# Altium PCB Uravu_2.PcbDoc
Units mil, origin at the board's own origin, x right, y up, seen from the top; angles counter-clockwise.
Board outline 3825.79 x 3924.21 mil, 2 copper layers (Top Layer, Bottom Layer); 72 components, 63 nets, 226 pads, 10 vias.
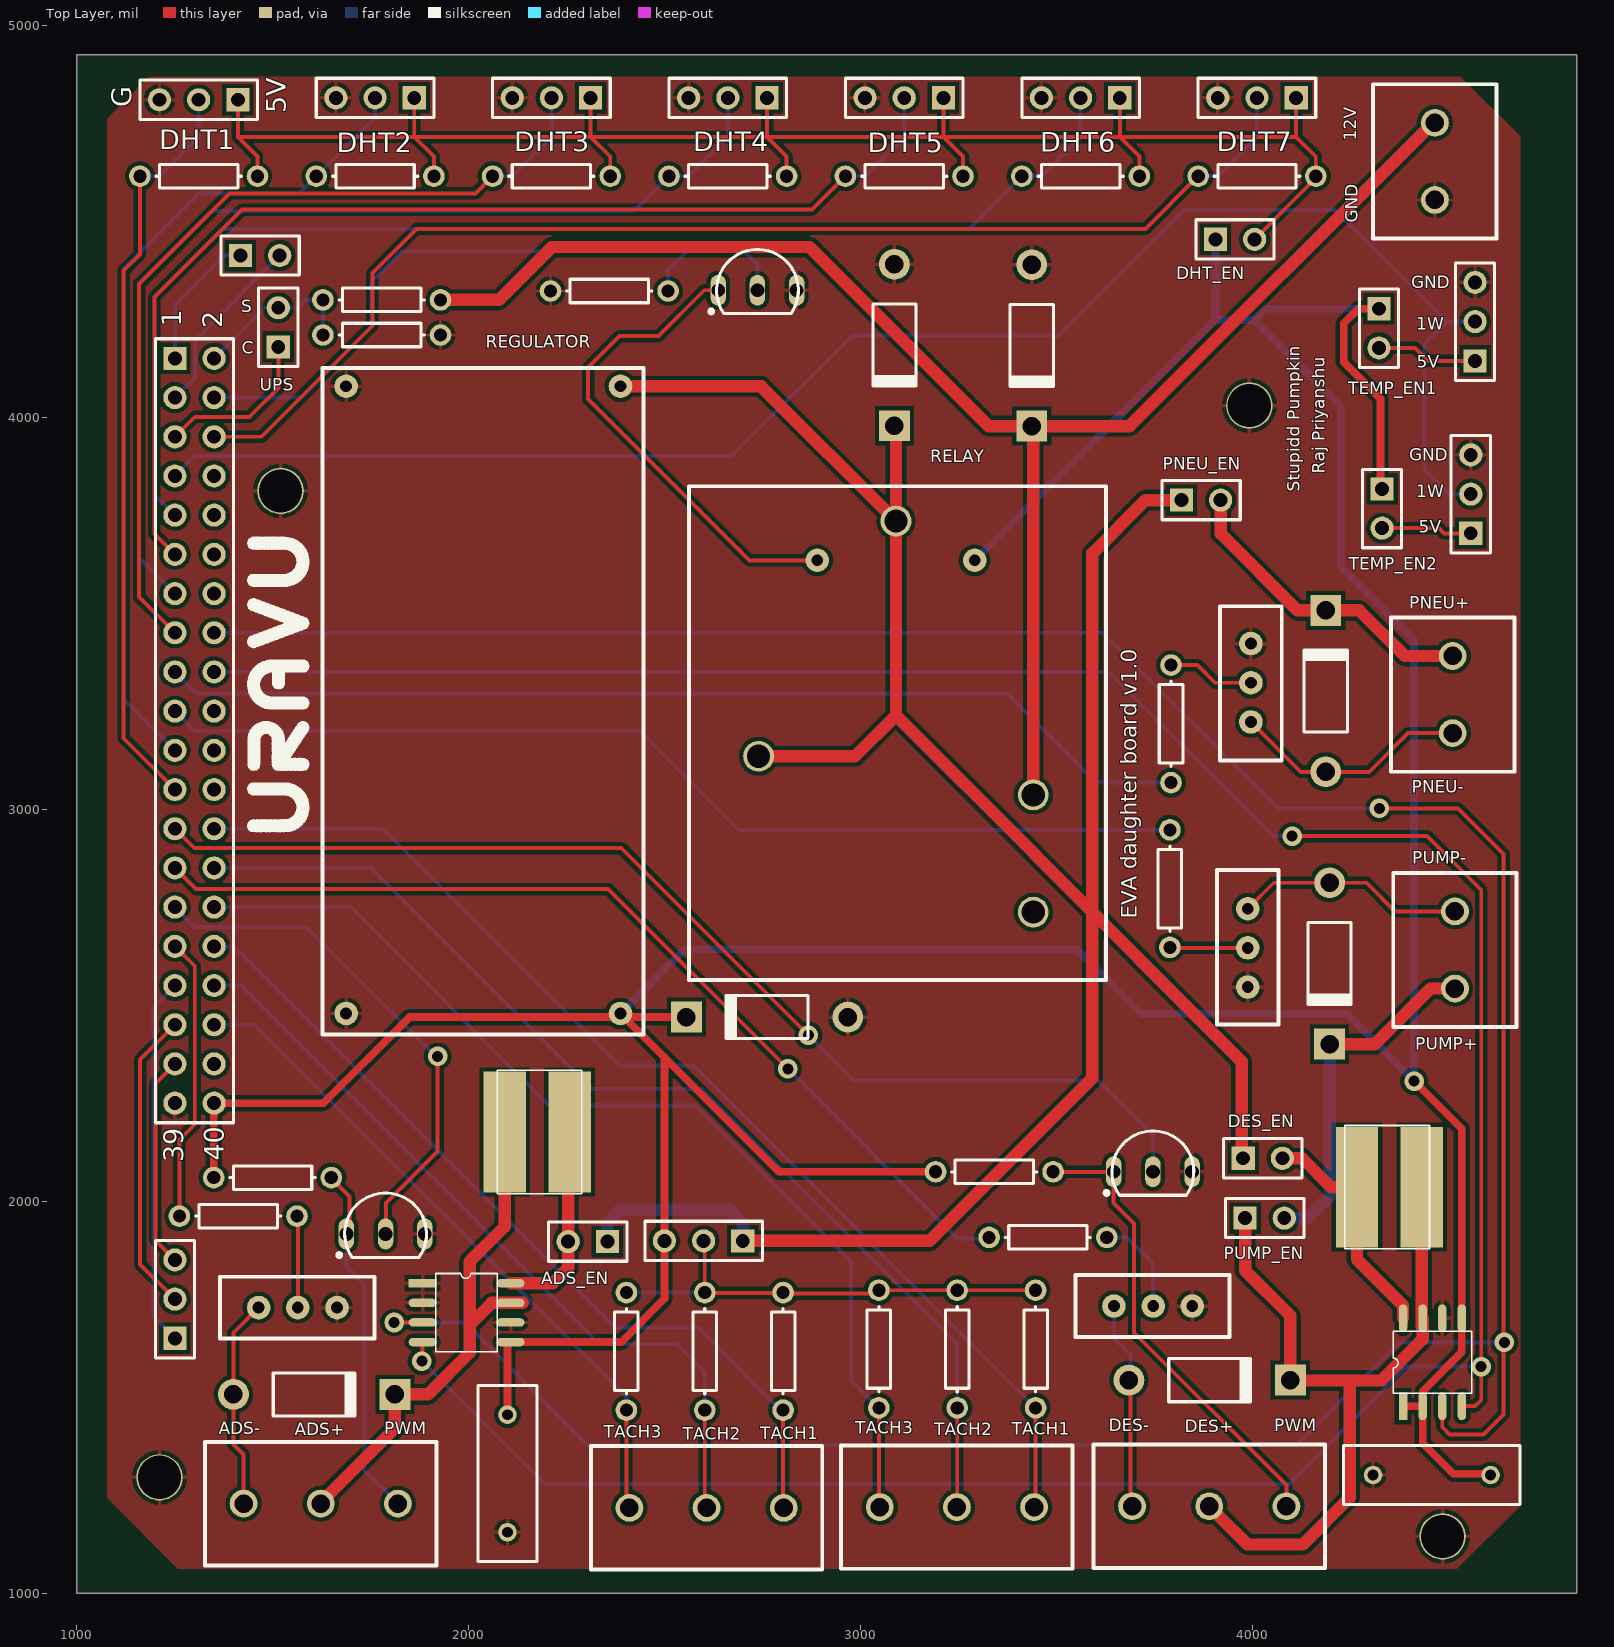
[diagram p0: Top Layer view]
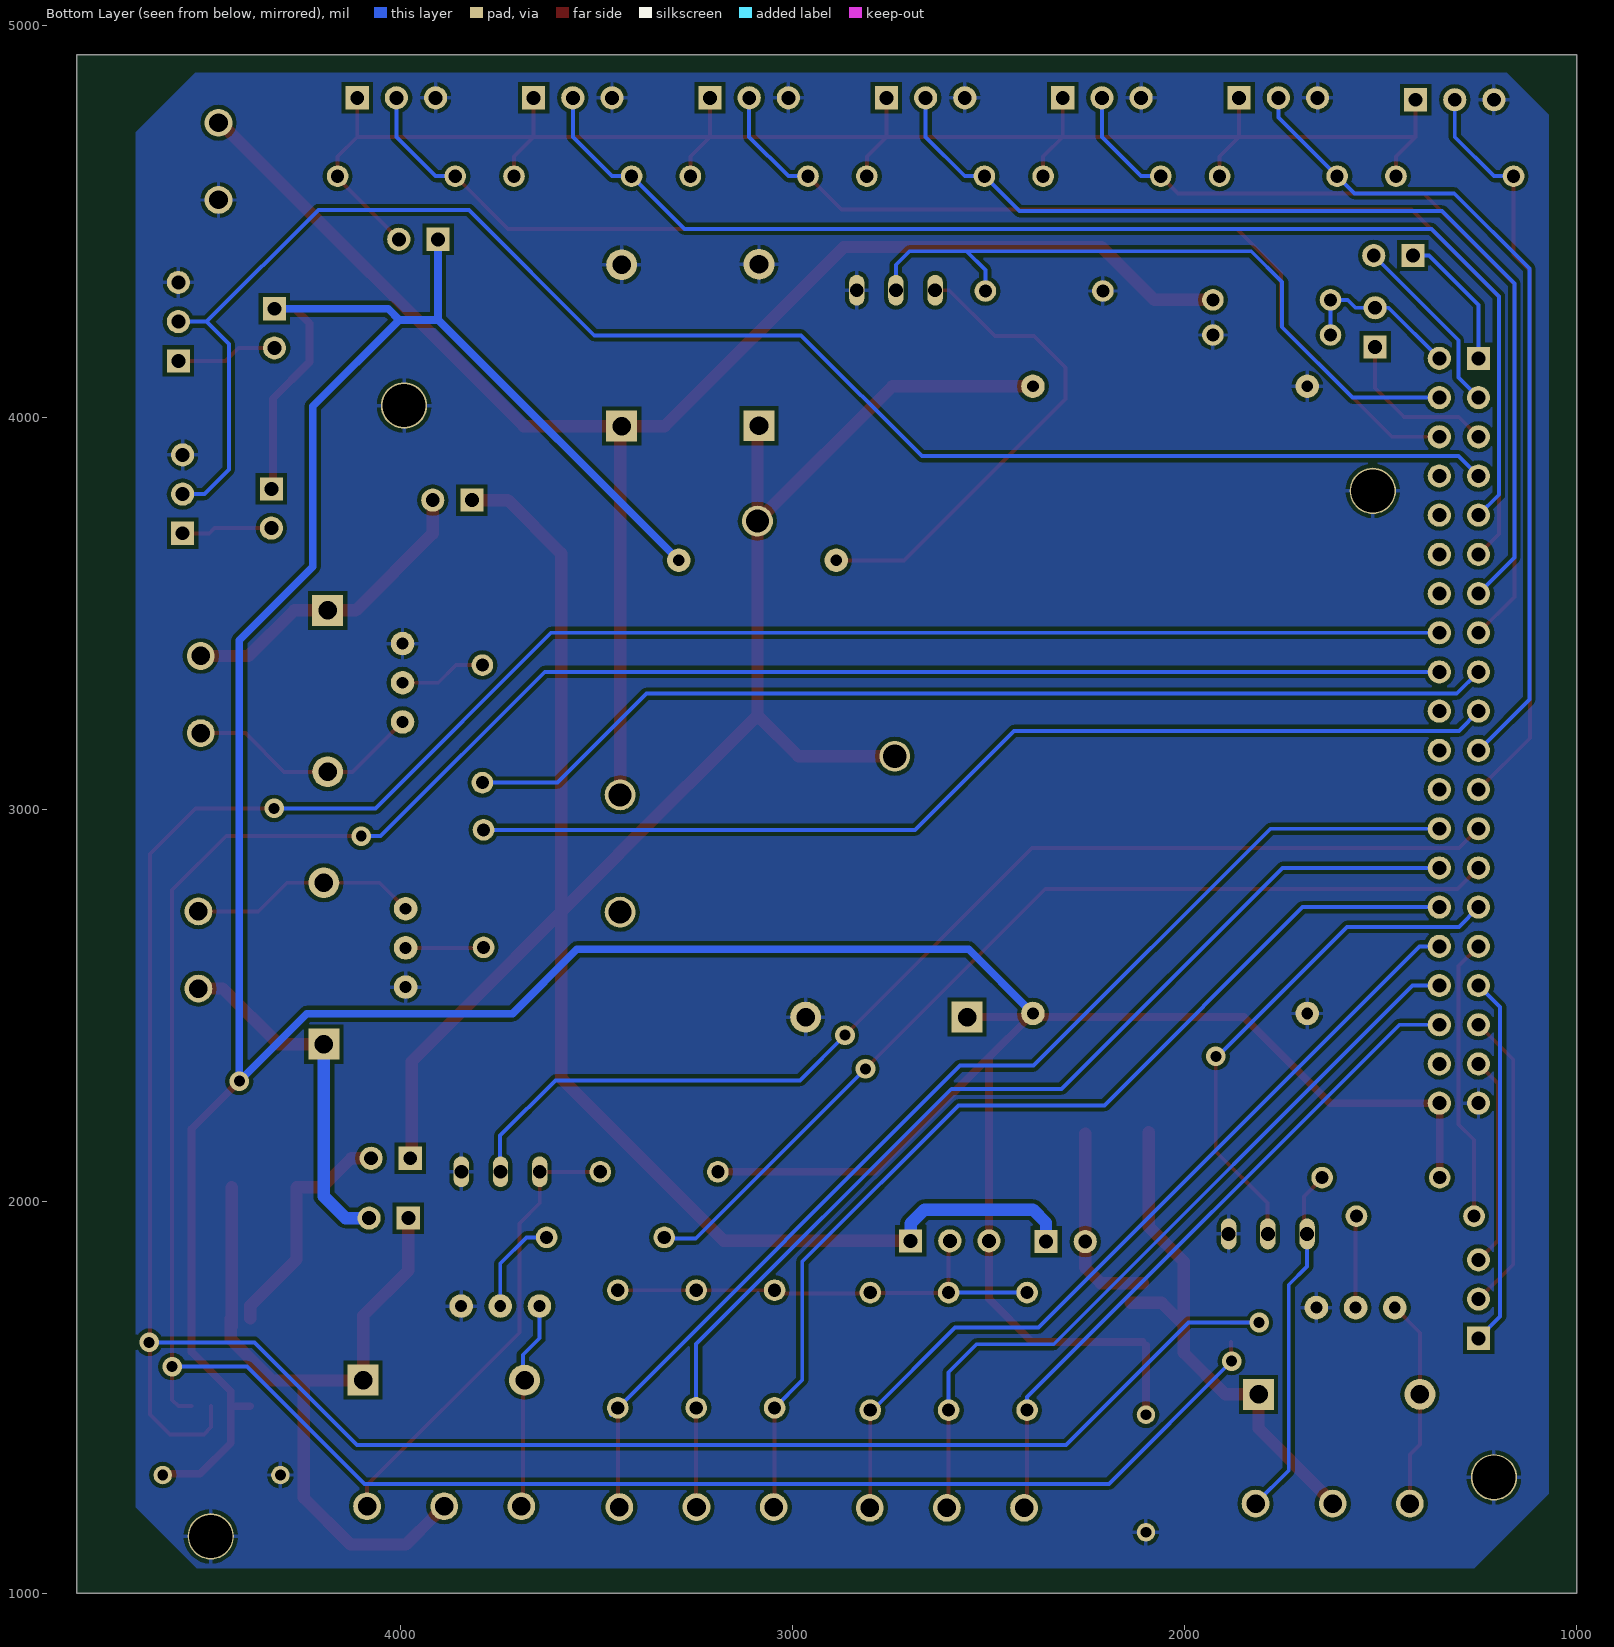
[diagram p1: Bottom Layer view, seen from below]

## Layer stack, top to bottom
Top Solder: solder mask 0.4, Solder Resist, Dk 3.5
Top Layer: signal copper 1.4
Dielectric 1: dielectric 12.6, FR-4, Dk 4.8
Bottom Layer: signal copper 1.4
Bottom Solder: solder mask 0.4, Solder Resist, Dk 3.5

## Board outline
1000,1000 4825.79,1000 4825.79,4924.21 1000,4924.21

## Design rules (kind name [scope] priority, off if disabled: settings)
Clearance [All] p1: gap=10
PolygonConnect [All] p1: connectstyle=Relief reliefconductorwidth=10 reliefentries=4 polygonreliefangle="90 Angle" airgapwidth=10
RoutingVias [All] p1: holewidth=28 width=50 viastyle="Through Hole" minholewidth=28 minwidth=50 maxholewidth=28 maxwidth=50
SolderMaskExpansion [All] p1: expansion=4
UnpouredPolygon [All] p1: allowunpoured=FALSE
Width [All] p1: maxlimit=39.37 minlimit=10 preferedwidth=10
29 further rules are at their usual default settings.

## Components (designator, comment, footprint, x,y, rotation, side; value= is the part's Value field where it differs from the comment)
C1 "Cap" RAD-0.3 2098.43,1305.12 r90 top
C2 "Cap" RAD-0.3 4456.69,1301.18 r0 top
D1 "Diode 1N4007" DO-41 1605.32,1506.89 r0 top
D2 "Diode 1N4007" DO-41 3436.02,4183.07 r270 top
D3 "Diode 1N4007" DO-41 2760.83,2469.49 r180 top
D4 "Diode 1N4007" DO-41 3085.63,4184.06 r270 top
D5 "Diode 1N4007" DO-41 3889.76,1543.31 r0 top
D6 "Diode 1N4007" DO-41 4195.87,2606.3 r270 top
D7 "Diode 1N4007" DO-41 4186.02,3301.18 r90 top
P1 "Header 3" "Screw Terminal 3" 2803.15,1217.52 r180 top
P2 "Header 3" "Screw Terminal 3" 1425.2,1228.35 r0 top
P3 "Header 20X2" HDR2X20 1250,4150 r270 top
P4 "Header 2" HDR1X2 2353.35,1896.65 r180 top
P5 "Header 3" HDR1X3 1250,1650 r90 top
P6 "Header 3" HDR1X3 2698.82,1898.62 r180 top
P7 "Header 2" HDR1X2 1513.78,4179.13 r90 top
P7 "Header 2" HDR1X2 3980.32,1956.69 r0 top
P8 "Header 2" "Screw Terminal 2" 4464.57,4750.98 r270 top
P9 "Header 2X2" "LM2596 Module" 2386.81,4078.74 r270 top
P10 "Header 3" "Screw Terminal 3" 3441.93,1219.49 r180 top
P11 "Header 3" "Screw Terminal 3" 3691.93,1221.46 r0 top
P12 "Header 2" "Screw Terminal 2" 4515.75,2542.32 r90 top
P13 "Header 2" HDR1X2 3975.39,2109.25 r0 top
P14 "Header 3" HDR1X3 1410.63,4809.76 r180 top
P15 "Header 3" HDR1X3 1860.63,4814.76 r180 top
P16 "Header 3" HDR1X3 2310.63,4814.76 r180 top
P17 "Header 3" HDR1X3 2760.63,4814.76 r180 top
P18 "Header 3" HDR1X3 3210.63,4814.76 r180 top
P19 "Header 3" HDR1X3 3660.63,4814.76 r180 top
P20 "Header 3" HDR1X3 4110.63,4814.76 r180 top
P21 "Header 2" HDR1X2 3904.53,4453.74 r0 top
P22 "Header 2" HDR1X2 3817.91,3788.39 r0 top
P23 "Header 3" HDR1X3 4556.1,3703.74 r90 top
P24 "Header 3" HDR1X3 4566.93,4143.7 r90 top
P25 "Header 2" "Screw Terminal 2" 4509.84,3390.75 r270 top
P26 "Header 2" HDR1X2 4329.72,3816.93 r270 top
P27 "Header 2" HDR1X2 4321.85,4276.57 r270 top
P28 "Header 2" HDR1X2 1417.32,4412.4 r0 top
Q1 "2N2222" TO-226AA 1787.4,1916.34 r0 top
Q2 "IRLB8721" TO-220AB 1463.58,1728.35 r0 top
Q3 "Relay" Relay 2888.78,3634.84 r90 top
Q4 "2N2222" TO-226AA 2736.22,4323.82 r0 top
Q5 "2N2222" TO-226AA 3745.08,2074.8 r0 top
Q6 "IRLB8721" TO-220AB 3645.67,1732.28 r0 top
Q7 "IRLB8721" TO-220AB 3987.2,2746.06 r270 top
Q8 "IRLB8721" TO-220AB 3995.08,3222.44 r90 top
R1 "Res1" AXIAL-0.3 3045.87,1622.64 r270 top
R2 "Res1" AXIAL-0.3 3245.87,1622.64 r270 top
R3 "Res1" AXIAL-0.3 3445.87,1622.64 r270 top
R4 "Res1" AXIAL-0.3 2401.77,1616.73 r270 top
R5 "Res1" 2827 2091.54,2176.18 r0 top
R6 "Res1" AXIAL-0.3 2601.77,1616.73 r270 top
R7 "Res1" AXIAL-0.3 1499.02,2060.04 r180 top
R8 "Res1" AXIAL-0.3 2801.77,1616.73 r270 top
R9 "Res1" AXIAL-0.3 1411.42,1961.61 r180 top
R10 "Res1" AXIAL-0.3 1777.56,4299.21 r0 top
R10 "Res1" AXIAL-0.3 2358.27,4321.85 r0 top
R11 "Res1" AXIAL-0.3 1777.56,4209.65 r180 top
R11 "Res1" 2827 4431.1,2035.43 r180 top
R12 "Res1" AXIAL-0.3 3340.55,2074.8 r180 top
R13 "Res1" AXIAL-0.3 3477.36,1907.48 r180 top
R14 "Res1" AXIAL-0.3 4010.63,4614.76 r0 top
R15 "Res1" AXIAL-0.3 3788.39,2797.24 r90 top
R16 "Res1" AXIAL-0.3 1310.63,4614.76 r0 top
R17 "Res1" AXIAL-0.3 1760.63,4614.76 r0 top
R18 "Res1" AXIAL-0.3 2210.63,4614.76 r0 top
R19 "Res1" AXIAL-0.3 2660.63,4614.76 r0 top
R20 "Res1" AXIAL-0.3 3110.63,4614.76 r0 top
R21 "Res1" AXIAL-0.3 3560.63,4614.76 r0 top
R22 "Res1" AXIAL-0.3 3791.34,3217.52 r270 top
U1 "INA" SOIC8 1885.83,1790.35 r0 top
U2 "INA" SOIC8 4383.27,1480.71 r90 top

## Footprints (in the part's own frame and the unit in brackets; to place one, negate y for a bottom-side part, rotate by r counter-clockwise, add the part's x,y. Pads: shape width x height; smd on the part's side, far side on the other; paste and mask are expansions set on the pad)
2827 [mm]
  rect 2.75x7.82 smd: 1(0,0) 2(4.2,0)
  silkscreen extent -0.5,-4 5,4
AXIAL-0.3 [mm] "Axial Device, Thru-Hole; 2 Leads; 0.3 in Pin Spacing"
  round 1.4 hole 0.85: 1(-3.81,0) 2(3.81,0)
  silkscreen extent -2.77,-0.76 2.77,0.76
DO-41 [mm] "Diode, Axial; Body 5.2 x 2.7 mm (LxDia. max), Lead Dia. 0.86 mm (max)"
  round 2 hole 1.2: 1(-5.23,0)
  rect 2x2 hole 1.2: 2(5.23,0)
  silkscreen extent -2.65,-1.4 2.75,1.4
HDR1X2 [mm] "Connector; Header; 2 Position"
  rect 1.5x1.5 hole 0.9: 1(0,0)
  round 1.5 hole 0.9: 2(2.54,0)
  silkscreen extent -1.27,-1.27 3.81,1.27
HDR1X3 [mm] "Connector; Header; 3 Position"
  rect 1.5x1.5 hole 0.9: 1(0,0)
  round 1.5 hole 0.9: 2(2.54,0) 3(5.08,0)
  silkscreen extent -1.27,-1.27 6.35,1.27
HDR2X20 [mm] "Connector; Header; 20x2 Position"
  rect 1.5x1.5 hole 0.9: 1(0,0)
  round 1.5 hole 0.9: 2(0,2.54) 3(2.54,0) 4(2.54,2.54) 5(5.08,0) 6(5.08,2.54) 7(7.62,0) 8(7.62,2.54) 9(10.16,0) 10(10.16,2.54) 11(12.7,0) 12(12.7,2.54) 13(15.24,0) 14(15.24,2.54) 15(17.78,0) 16(17.78,2.54) 17(20.32,0) 18(20.32,2.54) 19(22.86,0) 20(22.86,2.54) 21(25.4,0) 22(25.4,2.54) 23(27.94,0) 24(27.94,2.54) 25(30.48,0) 26(30.48,2.54) 27(33.02,0) 28(33.02,2.54) 29(35.56,0) 30(35.56,2.54) 31(38.1,0) 32(38.1,2.54) 33(40.64,0) 34(40.64,2.54) 35(43.18,0) 36(43.18,2.54) 37(45.72,0) 38(45.72,2.54) 39(48.26,0) 40(48.26,2.54)
  silkscreen extent -1.27,-1.27 49.53,3.81
"LM2596 Module" [mil] "DC-DC regulator used in Uravu Labs for 12V - 5V conversion"
  round 60 hole 30: 1(0,0) 2(1600,0) 3(0,-700) 4(1600,-700)
  silkscreen extent -47,-760 1654,59
RAD-0.3 [mm] "Radial Cap, Thru-Hole; 2 Leads; 0.3 in Pin Spacing"
  round 1.2 hole 0.7: 1(-3.81,0) 2(3.81,0)
  silkscreen extent -5.71,-1.91 5.71,1.91
Relay [mm] "L90CSDC12V"
  round 1.524 hole 0.762: 1(0,0) 2(0,-10.2)
  round 2 hole 1.5: 3(2.54,-5.1) 4(-12.7,3.8) 5(-22.8,-14) 6(-15.2,-14)
  silkscreen extent -27.2,-18.7 4.8,8.3
"Screw Terminal 2" [mm]
  round 1.8 hole 1.2: 1(0,0) 2(5,0)
  silkscreen extent -2.5,-4 7.5,4
"Screw Terminal 3" [mm]
  round 1.8 hole 1.2: 1(0,0) 2(5,0) 3(10,0)
  silkscreen extent -2.5,-4 12.5,4
SOIC8 [mm]
  rect 1.8x0.55 smd: 1(-0.1,0)
  oval 1.8x0.55 smd: 2(-0.1,-1.27) 3(-0.1,-2.54) 4(-0.1,-3.81) 5(5.6,-3.81) 6(5.6,-2.54) 7(5.6,-1.27) 8(5.6,0)
  silkscreen extent 0.75,-4.44 4.75,0.64
TO-220AB [mil] "IRLB8721"
  round 60 hole 30: 1(0,0) 2(100,0) 3(200,0)
  silkscreen extent -98,-79 295,79
TO-226AA [mm] "BJT"
  oval 1x2 hole 0.9: 1(-2.54,0) 2(0,0) 3(2.54,0)
  silkscreen extent -3.13,-1.52 2.65,2.65, body extent -2.66,-1.52 2.66,2.66, height 5.33

## Part data
C1 C2: "Capacitor"
D1 D2 D3 D4 D5 D6 D7: "1 Amp General Purpose Rectifier"
P1 P2 P5 P6 P10 P11 P14 P15 P16 P17 P18 P19 P20 P23 P24: "Header, 3-Pin"
P3: "Header, 20-Pin, Dual row"
P4 P7 P7 P8 P12 P13 P21 P22 P25 P26 P27 P28: "Header, 2-Pin"
P9: "Header, 2-Pin, Dual row"
Q1 Q4 Q5: library part NPN, "NPN Bipolar Transistor"
Q2 Q6 Q7 Q8: library part MOSFET-N, "N-Channel MOSFET"
R1 R2 R3 R4 R5 R6 R7 R8 R9 R10 R10 R11 R11 R12 R13 R14 R15 R16 R17 R18 R19 R20 R21 R22: "Resistor"
U1 U2: library part INA219, "INA219: Bidirectional Current/Power Monitor With I2C Interface"

## Free pads (board coordinates)
  round 118.11 hole 110.24: SHIELD(1210.63,1295.28) SHIELD(1519.68,3812.01) SHIELD(3991.14,4029.53) SHIELD(4484.25,1144.68)

## Via types
v1: diameter 50, hole 28, Top Layer to Bottom Layer, 10 vias

## Nets (pads, with @x,y where several pads share a name; then routed paths per layer and width w, separated by ;. In a path a pad name is that pad's centre, name@x,y a point inside that pad or via, vN(x,y) a via of type N, cw(c..) or ccw(c..) an arc to the next point about the centre after c; other vN are vias at no path point)
5V: C1.2 C2.2 D3.2 P3.40 P6.3 P9.2 P21.1 P26.1 P27.1 Q3.2 R7.2 R12.2 U1.5 U2.1 U2.2 U2.5 | length 11355.7
  Top Layer w19.68: R7.2@1349.02,2077.76 1349.02,2250 1628.94,2250 1848.43,2469.49 P9.2@2396.06,2469.49 ; C1.2 U1.5@2098.43,1632.48 ; U1.5 2388.39,1640.35 2498.82,1750.79 P6.3 2498.82,2366.73 ; P9.2 P9.2@2396.06,2469.49 ; D3.2 P9.2@2396.06,2469.49 ; R12.2 2790.75,2074.8 2498.82,2366.73 ; P27.1 4269.69,4276.57 4232.28,4239.17 4232.28,4140.75 4325.79,4047.24 P26.1@4325.79,3816.93 ; U2.1 U2.2 ; v1(4411.42,2306.1) 4533.27,2184.25 U2.5 4533.27,1614.96 4433.27,1514.96 U2.2 ; C2.2@4606.69,1304.13 4511.81,1304.13 4433.27,1382.68 U2.2 ; P9.2@2396.06,2469.49 2498.82,2366.73
  Bottom Layer w19.68: P9.2 2550.79,2642.72 3550.2,2642.72 3714.57,2478.35 4239.17,2478.35 v1(4411.42,2306.1) 4411.42,3431.1 4224.41,3618.11 4224.41,4027.56 4003.94,4248.03 3903.54,4248.03 Q3.2 ; 3904.53,4248.03 P21.1 ; 4002.95,4248.03 4031.5,4276.57 P27.1
5V1WA: P24.1 P27.2 | length 258.7
  Top Layer w10: P27.2 4413.98,4176.57 4446.85,4143.7 P24.1
5V1WB: P23.1 P26.2 | length 235.8
  Top Layer w10: P26.2@4325.79,3716.93 4475,3716.93 4488.19,3703.74 P23.1
5VDHT: P14.1 P15.1 P16.1 P17.1 P18.1 P19.1 P20.1 P21.2 R14.2 R16.2 R17.2 R18.2 R19.2 R20.2 R21.2 | length 4460.7
  Top Layer w10: P14.1 1410.63,4714.76 ; R16.2 1460.63,4664.76 1410.63,4714.76 ; P15.1 1860.63,4714.76 ; R17.2 1910.63,4664.76 1860.63,4714.76 ; P16.1 2310.63,4714.76 ; R18.2 2360.63,4664.76 2310.63,4714.76 ; P17.1 2760.63,4714.76 ; R19.2 2810.63,4664.76 2760.63,4714.76 ; P18.1 3210.63,4714.76 ; R20.2 3260.63,4664.76 3210.63,4714.76 ; P19.1 3660.63,4714.76 ; R21.2 3710.63,4664.76 3660.63,4714.76 ; P21.2 R14.2@4160.63,4609.84 ; P20.1 4110.63,4714.76 ; R14.2 4160.63,4664.76 4110.63,4714.76 ; 1410.63,4714.76 1860.63,4714.76 ; 1860.63,4714.76 2310.63,4714.76 ; 2310.63,4714.76 2760.63,4714.76 ; 2760.63,4714.76 3210.63,4714.76 ; 3210.63,4714.76 3660.63,4714.76 ; 3660.63,4714.76 4110.63,4714.76
12V: D2.2 P8.1 Q3.6 R10.2@1927.56,4299.21 | length 4042
  Top Layer w31.5: R10.2@1927.56,4299.21 2076.77,4299.21 2211.61,4434.06 2869.09,4434.06 3325.98,3977.17 D2.2 3685.83,3977.17 P8.1@4462.11,4753.44 ; Q3.6 3439.96,3970.28 D2.2@3444.88,3975.2
12VA: D4.2 P4.1 P6.1 P9.1 P13.1 P22.1 Q3.3 Q3.4 | length 6637.3
  Top Layer w31.5: P9.1 2745.67,4078.74 Q3.3 ; P6.1 3175.2,1898.62 3590.55,2313.98 3590.55,3652.56 3726.38,3788.39 P22.1 ; Q3.4 2985.24,3134.84 3089.57,3239.17 ; D4.2@3089.57,3978.15 Q3.3 ; P13.1@3971.46,2097.44 3971.46,2356.3 3444.88,2882.87 3444.88,2883.86 3089.57,3239.17 ; 3089.57,3239.17 Q3.3
  Bottom Layer w31.5: P4.1 2353.35,1944.88 2386.81,1978.35 2663.39,1978.35 2698.82,1942.91 P6.1
CE0N_RPI: P3.3 P28.2 | length 493.1
  Bottom Layer w10: P3.3@1261.61,4050 P3.3 1301.18,4101.18 1301.18,4196.26 P28.2 ; P28.2@1516.73,4415.35 P28.2@1522.64,4421.26
CE1N_RPI: P3.1 P28.1 | length 355.9
  Bottom Layer w10: P3.1 1250,4286.42 1375.98,4412.4 P28.1
CTRL_1W: P3.7 P23.2 P24.2 | length 4261
  Bottom Layer w10: P3.7 1300.59,3900.59 2670.28,3900.59 2978.35,4208.66 3505.91,4208.66 3825.79,4528.54 4209.84,4528.54 4494.69,4243.7 ; P23.2 4500.39,3803.74 4437.99,3866.14 4437.99,4187.01 4494.69,4243.7 ; P24.2 4494.69,4243.7
CTRL_PNEU: P3.17 R22.2 | length 2658.3
  Bottom Layer w10: P3.17 1305.47,3294.53 3372.8,3294.53 3599.8,3067.52 R22.2
CTRL_UPS: P3.5 P7.1@1513.78,4179.13 | length 419.8
  Top Layer w10: P3.5 1300.98,4000.98 1439.96,4000.98 1513.78,4074.8 P7.1@1513.78,4179.13
DHT1: P3.23 P14.2 R16.1 | length 1922.6
  Top Layer w10: R16.1 1160.63,4415.55 1119.09,4374.02 1119.09,3180.91 P3.23
  Bottom Layer w10: R16.1 1210.63,4614.76 1310.63,4714.76 P14.2
DHT2: P3.21 P15.2 R17.1 | length 2128.1
  Bottom Layer w10: P3.21 1120.08,3279.92 1120.08,4378.94 1312.01,4570.87 1566.73,4570.87 R17.1 1760.63,4764.76 P15.2@1760.63,4809.76
DHT3: P3.15 P16.2 R18.1 | length 2230.1
  Top Layer w10: P3.15 1158.46,3541.54 1158.46,4339.57 1389.76,4570.87 2016.73,4570.87 R18.1
  Bottom Layer w10: R18.1 2110.63,4614.76 2210.63,4714.76 P16.2@2210.63,4809.76
DHT4: P3.13 P17.2 R19.1 | length 2580.6
  Bottom Layer w10: P3.13 1158.46,3641.54 1158.46,4340.55 1343.5,4525.59 2421.46,4525.59 R19.1 2560.63,4614.76 2660.63,4714.76 P17.2@2660.63,4809.76
DHT5: P3.11 P18.2 R20.1 | length 2854.8
  Top Layer w10: P3.11 1197.83,3702.17 1197.83,4306.1 1421.26,4529.53 2875.39,4529.53 R20.1
  Bottom Layer w10: R20.1 3010.63,4614.76 3110.63,4714.76 P18.2@3110.63,4809.76
DHT6: P3.9 P19.2 R21.1 | length 3205.9
  Bottom Layer w10: P3.9 1197.83,3802.17 1197.83,4308.07 1370.08,4480.31 3276.18,4480.31 R21.1 3460.63,4614.76 3560.63,4714.76 P19.2@3560.63,4809.76
DHT7: P3.6 P20.2 R14.1 | length 3151.4
  Top Layer w10: P3.6 1470.67,3950 1753.94,4233.27 1753.94,4368.11 1866.14,4480.31 3726.18,4480.31 R14.1
  Bottom Layer w10: R14.1 3910.63,4614.76 4010.63,4714.76 P20.2@4010.63,4809.76
GND: C1.1 C2.1 D2.1 D3.1 D4.1 P3.39 P8.2 P9.3 P9.4 P14.3 P15.3 P16.3 P17.3 P18.3 P19.3 P20.3 P23.3 P24.3 pad.SHIELD Q1.3 Q2.3 Q4.3 Q5.3 Q6.3 Q7.3 Q8.3 R10.1@2208.27,4321.85 R11.1@1927.56,4209.65 U1.1 U1.2 U1.6 U2.6
MISO_RPI: P3.35 P5.2 | length 773.4
  Top Layer w10: P5.2 1161.42,1838.58 1161.42,2361.42 P3.35
MOSI_RPI: P3.33 P5.1 | length 945.7
  Bottom Layer w10: P5.1 1194.88,1705.12 1194.88,2494.88 P3.33
NetP4_2: P4.2 R5.2 U1.8 | length 506
  Top Layer w31.5: U1.8 2213.58,1790.35 2253.35,1830.12 P4.2 R5.2@2253.35,2172.64
NetP8_2: P6.2 R1.1 R2.1 R3.1 R4.1 R6.1 R8.1 | length 1174
  Top Layer w10: P6.2@2601.77,1895.67 R6.1 2601.77,1765.75 R8.1@2801.77,1765.75 ; R8.1@2801.77,1763.78 R1.1@3045.87,1763.78 ; R1.1 R2.1 R3.1
  Bottom Layer w10: R4.1 R6.1
NetP15_2: P13.2 R11.2@4265.75,2035.43 U2.8 | length 603.9
  Top Layer w31.5: P13.2 4125.98,2109.25 4199.8,2035.43 4265.75,2035.43 4265.75,1851.38 4383.27,1733.86 U2.8
NetQ2_2: Q2.2 R9.1 | length 245
  Top Layer w10: R9.1@1563.58,1961.61 1563.58,1743.11 Q2.2@1582.28,1724.41
NetQ3_1: Q3.1 Q4.1 | length 1249.4
  Top Layer w10: Q4.1 2600.39,4323.82 2483.27,4206.69 2383.86,4206.69 2304.13,4126.97 2304.13,4046.26 2715.55,3634.84 Q3.1
NetQ6_2: Q6.2 R13.1 | length 254.5
  Bottom Layer w10: R13.1 3679.13,1907.48 3745.67,1840.94 Q6.2
NetQ7_2: Q7.2 R15.1 | length 201.8
  Top Layer w10: R15.1@3789.37,2646.26 Q7.2@3991.14,2646.26
NetQ8_2: Q8.2 R22.1 | length 222.4
  Top Layer w10: R22.1 3858.86,3367.52 3903.94,3322.44 Q8.2
NRST2: P3.4 Q4.2 R10.2@2508.27,4321.85 | length 1808.7
  Bottom Layer w10: P3.4 1571.65,4050 1750.98,4229.33 1750.98,4344.49 1829.72,4423.23 2556.1,4423.23 ; R10.2@2508.27,4321.85 2508.27,4375.39 2556.1,4423.23 ; Q4.2 2736.22,4388.78 2701.77,4423.23 2556.1,4423.23
PA0: P3.31 R9.2 | length 725.5
  Top Layer w10: P3.31 1300.55,2599.45 1300.55,2195.63 1261.42,2156.5 R9.2
PA1: P3.29 Q1.2 | length 1343.3
  Top Layer w10: Q1.2@1788.39,1908.46 1788.39,1995.08 1920.28,2126.97 v1(1920.28,2369.09)
  Bottom Layer w10: P3.29 1300.2,2699.8 1585.63,2699.8 1916.34,2369.09 v1(1920.28,2369.09)
PA2: P3.27 R13.2 | length 2469
  Top Layer w10: P3.27 1303.74,2796.26 2355.32,2796.26 v1(2813.98,2337.6)
  Bottom Layer w10: v1(2813.98,2337.6) 3247.05,1904.53 R13.2@3327.36,1904.53
PA3: P3.25 Q5.2 | length 2912.8
  Top Layer w10: P3.25 1299.41,2900.59 2388.78,2900.59 v1(2866.14,2423.23)
  Bottom Layer w10: v1(2866.14,2423.23) 2981.3,2308.07 3605.31,2308.07 3746.06,2167.32 Q5.2@3746.06,2074.8
PA6: P3.19 R15.2 | length 2663.8
  Bottom Layer w10: P3.19 1300.2,3199.8 2435.04,3199.8 2687.6,2947.24 R15.2
PA8: P3.14
PA11: P3.20
PA12: P3.22
PA15: P3.24
PB3: P3.26 P10.1 R3.2 | length 2983
  Top Layer w10: P10.1@3445.87,1227.76 R3.2 R3.2@3445.87,1477.76
  Bottom Layer w10: P3.26 1780.32,2950 2384.84,2345.47 2573.03,2345.47 R3.2@3463.68,1454.82
PB4: P3.28 P10.2 R2.2 | length 2819.3
  Top Layer w10: R2.2 3245.87,1216.93 P10.2@3249.02,1213.78
  Bottom Layer w10: P3.28 1750.39,2850 2313.98,2286.42 2593.5,2286.42 ; 2595.47,2285.43 3245.87,1635.04 R2.2
PB5: P3.30 P10.3 R1.2 | length 2654.7
  Top Layer w10: R1.2@3045.87,1463.78 3045.87,1220.08 P10.3@3052.17,1213.78
  Bottom Layer w10: P3.30 1698.82,2750 2204.72,2244.09 2576.77,2244.09 2975.39,1845.47 2975.39,1543.11 R1.2
PB6: P1.1 P3.32 R8.2 | length 2194.3
  Top Layer w10: P1.1@2801.77,1210.83 R8.2@2801.77,1460.83
  Bottom Layer w10: P3.32 1400.2,2650 2373.03,1677.17 2585.43,1677.17 R8.2@2801.77,1460.83
PB7: P1.2 P3.34 R6.2 | length 2009.9
  Top Layer w10: P1.2@2601.77,1213.98 R6.2@2601.77,1460.83
  Bottom Layer w10: P3.34 1418.5,2550 2333.66,1634.84 2530.32,1634.84 2601.77,1563.39 R6.2@2601.77,1460.83
PB8: P1.3 P3.36 R4.2 | length 1728
  Top Layer w10: P1.3@2401.77,1217.13 R4.2@2401.77,1460.83
  Bottom Layer w10: P3.36 1451.57,2450 2401.77,1499.8 R4.2@2401.77,1460.83
PB9: P3.38
PB13: P3.8
PB14: P3.10
PB15: P3.12
PWM_ADS: P2.3 Q1.1 R7.1 | length 938.8
  Top Layer w10: R7.1@1649.02,2077.76 1649.02,2057.68 1695.28,2011.42 Q1.1@1695.28,1908.46
  Bottom Layer w10: Q1.1 1687.4,1833.27 1734.06,1786.61 1734.06,1313.19 P2.3 P2.3@1811.02,1228.35
PWM_DES: P11.3 Q5.1 R12.1 | length 1190.4
  Top Layer w10: R12.1 Q5.1 3645.08,1994.69 3697.05,1942.72 3697.05,1664.17 4085.63,1275.59 P11.3
SCL_RPI: P3.18 U1.4 U2.4 | length 7833.5
  Top Layer w10: v1(1879.92,1591.54) 1881.89,1589.57 U1.4 ; v1(4100.39,2931.1) 4444.88,2931.1 4582.68,2793.31 4582.68,1493.11 4566.34,1476.77 U2.4
  Bottom Layer w10: P3.18 3632.28,3350 4051.18,2931.1 v1(4100.39,2931.1) ; v1(1879.92,1591.54) 2192.91,1278.54 4092.52,1278.54 4391.73,1577.76 v1@4586.61,1577.76
  other v1: 4582.68,1577.76
SCLK_RPI: P3.37 P5.3 | length 541.4
  Top Layer w10: P5.3 1200,1900 1200,2300 P3.37
SDA_RPI: P3.16 U1.3 U2.3 | length 8334
  Top Layer w10: v1@1813.39,1690.35 U1.3 ; v1(4322.83,3001.97) 4523.62,3001.97 4639.76,2885.83 v1@4639.76,1641.73 ; U2.3 4483.27,1423.23 4501.97,1404.53 4588.58,1404.53 4639.76,1455.71 v1@4639.76,1641.73 ; v1(4641.73,1639.76) v1@4639.76,1641.73
  Bottom Layer w10: P3.16 3615.94,3450 4063.98,3001.97 v1(4322.83,3001.97) ; v1(1809.45,1690.35) 1989.76,1690.35 2302.17,1377.95 4111.22,1377.95 4373.03,1639.76 v1(4641.73,1639.76)
SENSE_UPS: P3.2 P7.2@1513.78,4279.13 R10.1@1627.56,4299.21 R11.2@1627.56,4209.65 | length 428.9
  Bottom Layer w10: P3.2 1479.13,4279.13 1513.78,4279.13 1563.58,4279.13 1583.66,4299.21 1627.56,4299.21 R11.2@1627.56,4209.65
VADS+: D1.2 P2.2 R5.1 U1.7 | length 1350.7
  Top Layer w31.5: P2.2 1622.05,1231.3 1811.22,1420.47 D1.2 1895.67,1506.89 2001.97,1613.19 2001.97,1684.06 ; R5.1 2091.54,1935.04 2001.97,1845.47 2001.97,1684.06 ; U1.7@2137.6,1740.35 U1.7 2058.27,1740.35 2001.97,1684.06
VADS-: D1.1 P2.1 Q2.1 | length 537.3
  Top Layer w10: P2.1 1425.2,1353.35 1399.41,1379.13 D1.1 1399.41,1664.17 Q2.1
VDES+: D5.2 P7.1@3980.32,1956.69 P11.2 R11.1@4431.1,2035.43 U2.7 | length 1965.2
  Top Layer w31.5: P11.2@3912.89,1197.34 3986.22,1124.02 4127.95,1124.02 4247.05,1243.11 4247.05,1542.32 ; P7.1@3980.32,1956.69 3980.32,1822.83 4095.67,1707.48 D5.2 ; D5.2@4095.67,1542.32 4247.05,1542.32 ; U2.7@4431.1,1679.13 R11.1@4431.1,2035.43 ; U2.7 4433.27,1647.83 4414.37,1628.94 4327.76,1542.32 4247.05,1542.32
VDES-: D5.1 P11.1 Q6.1 | length 557.5
  Top Layer w10: D5.1@3687.8,1543.31 3687.8,1225.59 P11.1
  Bottom Layer w10: Q6.1 3645.67,1650.2 3687.8,1608.07 D5.1@3687.8,1515.75
VPNEU+: D7.2 P22.2 P25.1 | length 801.8
  Top Layer w31.5: P22.2@3918.21,3783.76 3918.21,3702.85 4113.98,3507.09 4271.46,3507.09 4387.8,3390.75 P25.1
VPNEU-: D7.1 P25.2 Q8.1 | length 608.3
  Top Layer w10: Q8.1 4122.24,3095.28 D7.1 4297.05,3095.28 4395.67,3193.9 P25.2
VPUMP+: D6.2 P7.2@4080.32,1956.69 P12.1 | length 905.6
  Top Layer w31.5: D6.2 4311.81,2400.39 4453.74,2542.32 P12.1
  Bottom Layer w31.5: P7.2@4080.32,1956.69 4140.75,1956.69 4195.87,2011.81 D6.2
VPUMP-: D6.1 P12.2 Q7.1 | length 586.2
  Top Layer w10: Q7.1 4053.35,2812.2 D6.1 4290.16,2812.2 4363.19,2739.17 P12.2
pads on no net: Q3.5

## Polygon pours and split planes (outlines as drawn)
GND on Top Layer "Gnd" (solid, pour order 4): 1184.06,4869.09 4529.53,4869.09 4682.09,4716.54 4682.09,1223.43 4520.67,1062.01 1257.87,1062.01 1076.77,1243.11 1076.77,4761.81
GND on Bottom Layer "Gnd" (solid, pour order 3): 1178.15,4878.94 4523.62,4878.94 4676.18,4726.38 4676.18,1218.5 4520.67,1062.99 1260.83,1062.99 1070.87,1252.95 1070.87,4771.65

## Silkscreen, mask and mechanical layers (free items; w line width, h text height)
Top Overlay:
  drawing of 1401 lines, arcs and shapes, not listed
  text "G" at 1138.78,4790.35 h50 r90
  text "5V" at 1532.48,4775.59 h50 r90
  text "12V" at 4263.78,4704.72 h32 r90
  text "DHT1" at 1210.63,4683.07 h50
  text "DHT3" at 2115.16,4678.15 h50
  text "DHT4" at 2572.83,4678.15 h50
  text "DHT7" at 3907.48,4678.15 h50
  text "DHT6" at 3457.68,4677.17 h50
  text "DHT2" at 1662.4,4676.18 h50
  text "DHT5" at 3017.72,4676.18 h50
  text "GND" at 4267.72,4496.06 h32 r90
  text "DHT_EN" at 3805.12,4352.36 h32
  text "GND" at 4404.53,4328.74 h32
  text "S" at 1419.29,4267.72 h32
  text "1" at 1266.73,4231.3 h50 r90
  text "2" at 1371.06,4226.38 h50 r90
  text "1W" at 4416.34,4222.44 h32
  text "REGULATOR" at 2043.31,4177.17 h32
  text "C" at 1420.28,4161.42 h32
  text "5V" at 4418.31,4125.98 h32
  text "UPS" at 1466.54,4067.91 h32
  text "TEMP_EN1" at 4243.11,4058.07 h32
  text "GND" at 4399.61,3888.78 h32
  text "RELAY" at 3177.17,3884.84 h32
  text "PNEU_EN" at 3769.68,3866.14 h32
  text "Raj Priyanshu" at 4184.06,3855.32 h32 r90
  text "Stupidd Pumpkin" at 4120.08,3810.04 h32 r90
  text "1W" at 4416.34,3796.26 h32
  text "5V" at 4423.23,3704.72 h32
  text "TEMP_EN2" at 4245.08,3610.24 h32
  text "PNEU+" at 4399.61,3511.81 h32
  text "PNEU-" at 4405.51,3041.34 h32
  text "PUMP-" at 4406.5,2861.22 h32
  text "EVA daughter board v1.0" at 3703.74,2720.47 h40 r90
  text "PUMP+" at 4414.37,2385.83 h32
  text "DES_EN" at 3936.02,2188.98 h32
  text "40" at 1375,2102.36 h50 r90
  text "39" at 1270.67,2099.41 h50 r90
  text "PUMP_EN" at 3926.18,1851.38 h32
  text "ADS_EN" at 2184.06,1787.4 h32
  text "DES-" at 3631.89,1412.4 h32
  text "PWM" at 4054.13,1412.4 h32
  text "DES+" at 3826.77,1410.43 h32
  text "TACH3" at 2985.24,1406.5 h32
  text "ADS-" at 1361.42,1404.72 h32
  text "PWM" at 1783.66,1404.72 h32
  text "TACH1" at 3384.84,1403.54 h32
  text "ADS+" at 1556.3,1402.76 h32
  text "TACH2" at 3187.01,1402.56 h32
  text "TACH3" at 2343.5,1395.67 h32
  text "TACH1" at 2743.11,1392.72 h32
  text "TACH2" at 2545.28,1391.73 h32
Mechanical 1:
  lines w10: 1043.31,1245.08 ccw(c1253.94,1245.08) 1253.94,1034.45 4523.62,1034.45 ccw(c4523.62,1234.25) 4723.43,1234.25 4723.43,4718.5 ccw(c4544.29,4718.5) 4544.29,4897.64 1188.98,4897.64 ccw(c1188.98,4751.97) 1043.31,4751.97 1043.31,1245.08

## Dimensions
1040.35,4900.59 to 1055.12,1033.46 on Top Overlay
1055.12,1033.46 to 4728.35,1047.24 on Top Overlay